# Altium PCB MIC29302.PcbDoc
Units mm, origin at the board's own origin, x right, y up, seen from the top; angles counter-clockwise.
Board outline 56.39 x 28.7 mm, 2 copper layers (Top Layer, Bottom Layer), stack 0.325 mm thick; 134 components, 7 nets, 626 pads, 56 vias.
Unrouted connection lines stored in the file: 1.
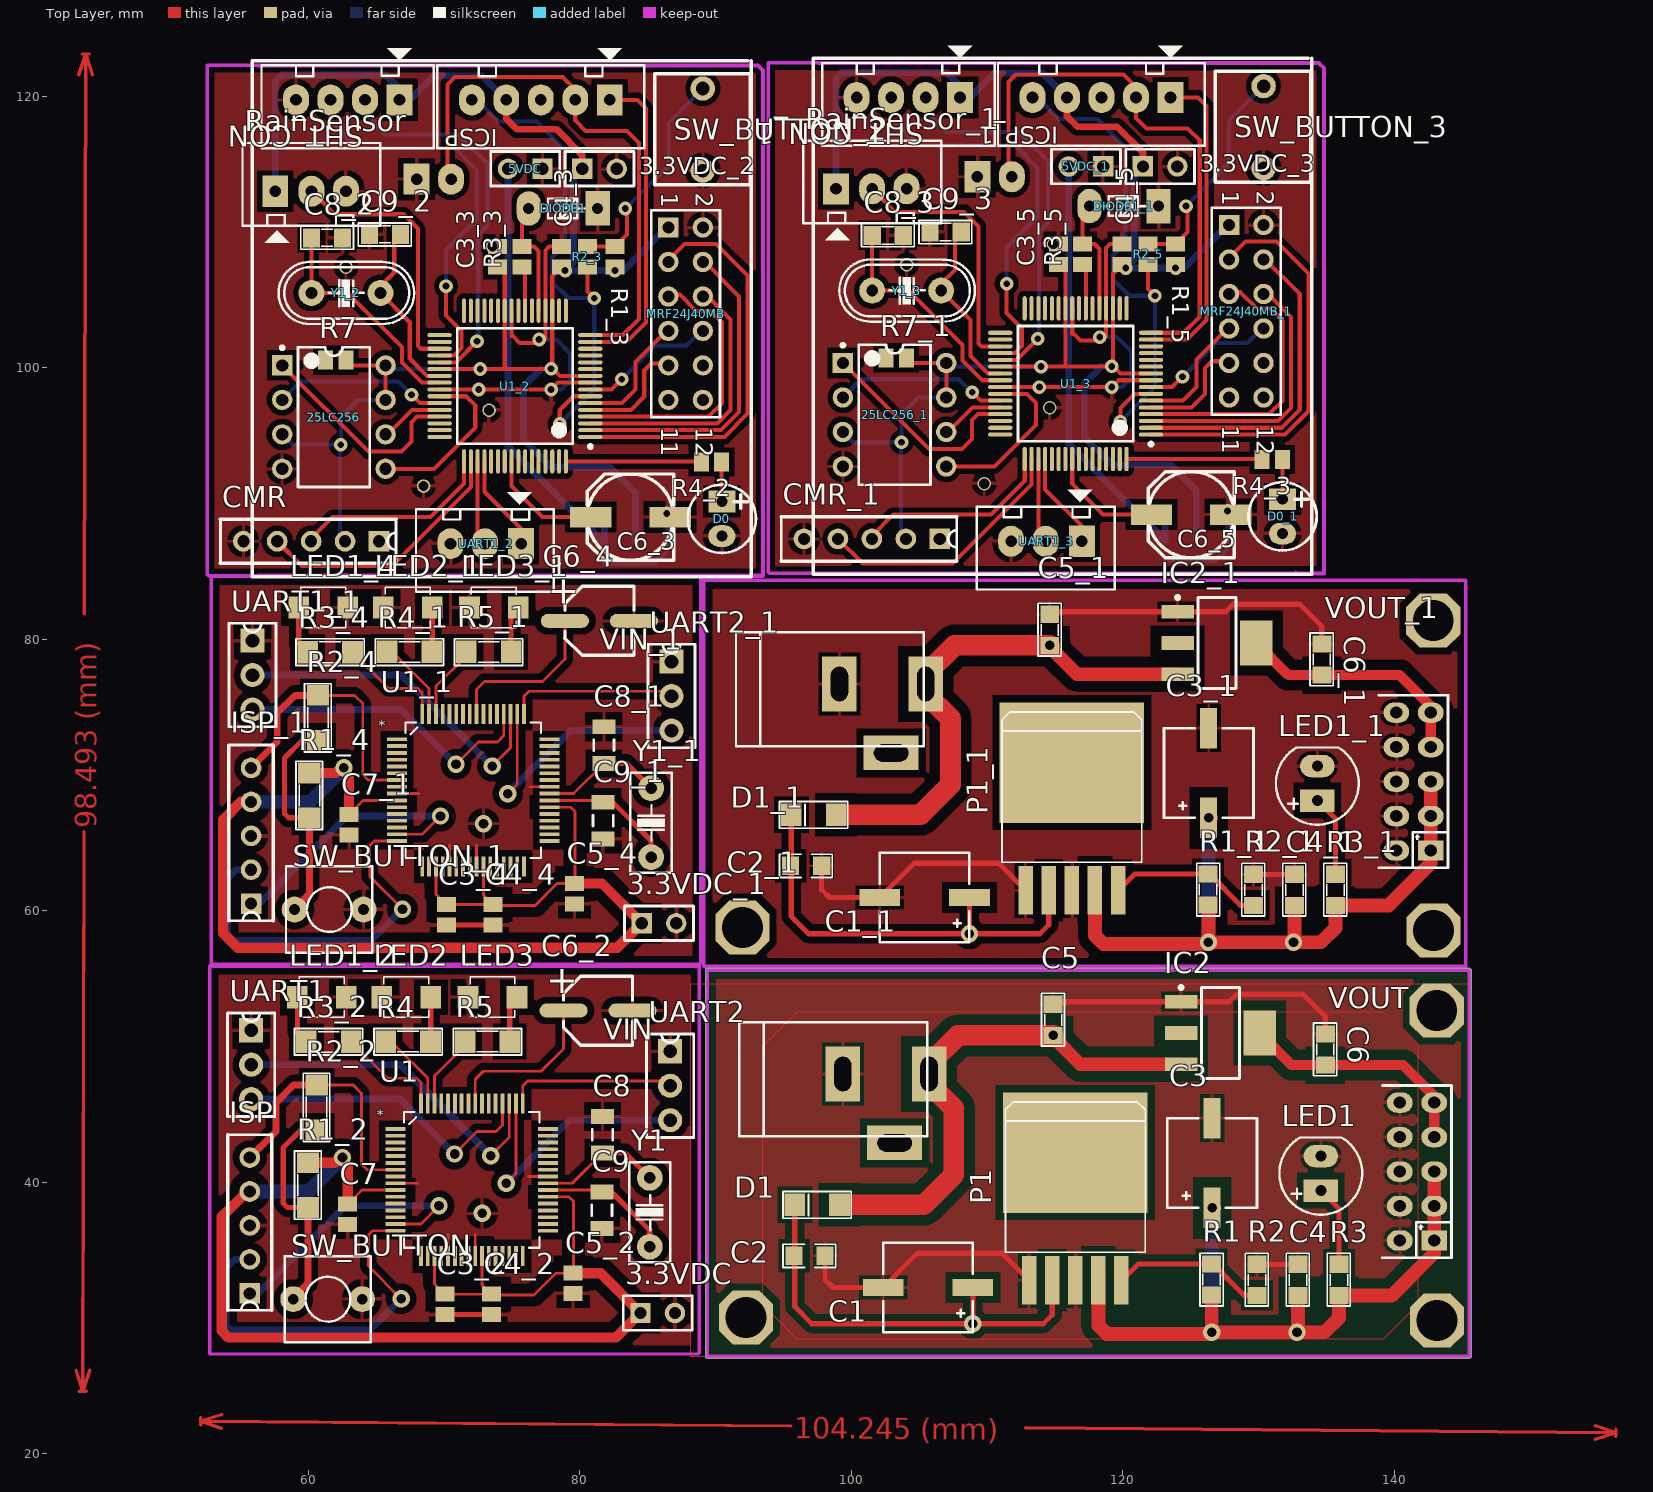
[diagram p0: Top Layer view]
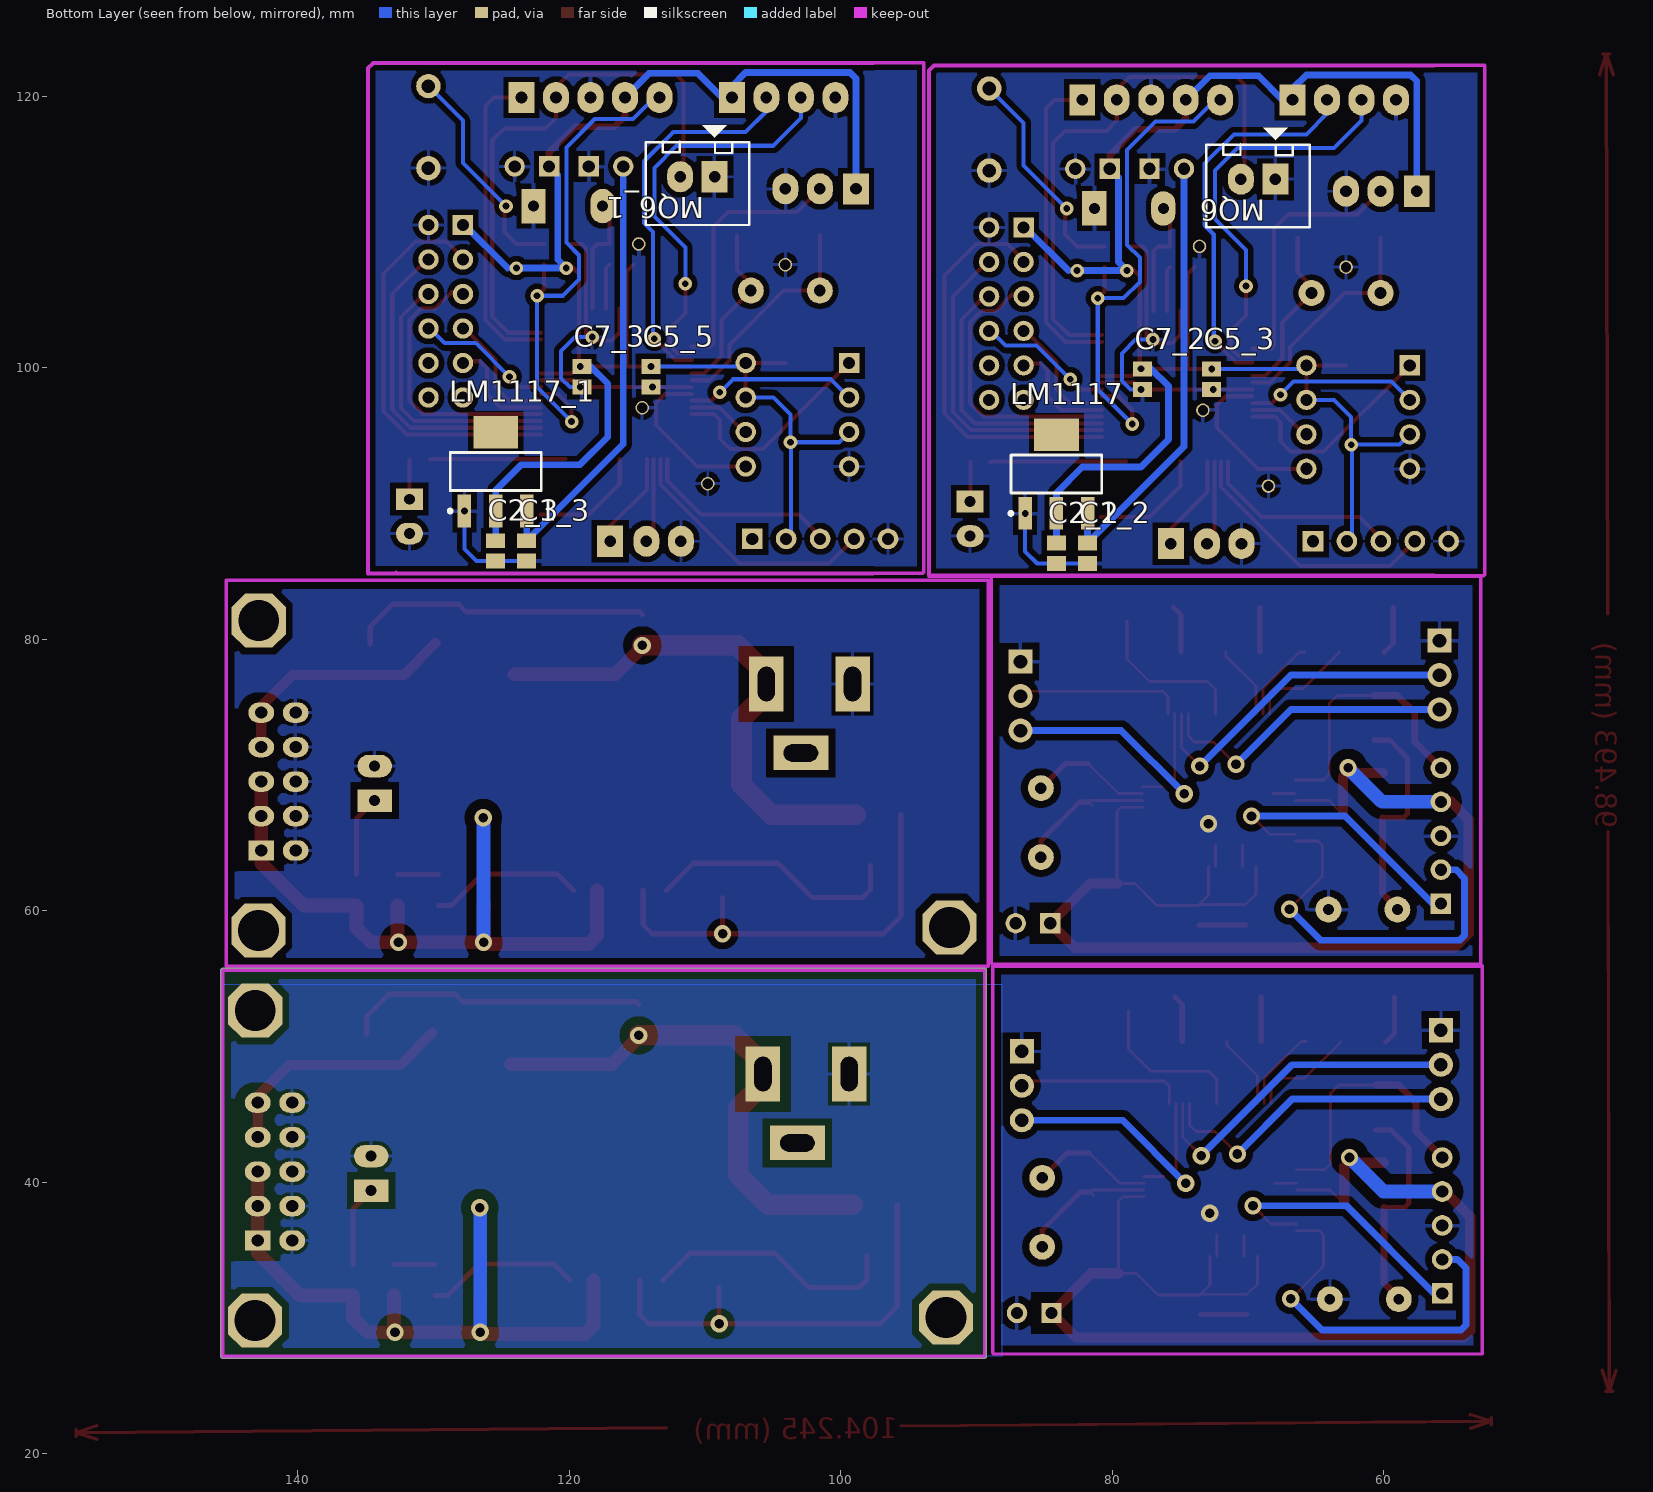
[diagram p1: Bottom Layer view, seen from below]

## Layer stack, top to bottom
Top Solder: solder mask 0.32, FR-4, Dk 4.8
Top Layer: signal copper 0.0356
Dielectric1: core 0.254, FR-4, Dk 4.2
Bottom Layer: signal copper 0.0356
Bottom Solder: solder mask 0.32, FR-4, Dk 4.8

## Board outline
89.281,27.178 ccw(c89.408,27.178) 89.408,27.051 145.542,27.051 ccw(c145.542,27.178) 145.669,27.178 145.669,55.626 ccw(c145.542,55.626) 145.542,55.753 89.408,55.753 ccw(c89.408,55.626) 89.281,55.626

## Design rules (kind name [scope] priority, off if disabled: settings)
Clearance 3.3V [InNet('3.3V')] p1: gap=0.762
Clearance VIN [InNet('IN')] p2: gap=0.762
Clearance VOUT [InNet('OUT')] p3: gap=0.762
Clearance [All] p4: gap=0.508
PolygonConnect [All] p1: connectstyle=Relief reliefconductorwidth=0.254 reliefentries=4 polygonreliefangle="90 Angle" airgapwidth=0.254
RoomDefinition Sheet2 [InComponentClass('Sheet2')] p1: confinementstyle=ConfineIn formatcopy=TRUE lockcomponents=FALSE outline 0,0 50.8,0 50.8,25.4 0,25.4
RoutingVias [All] p1: holewidth=0.711 width=1.27 viastyle="Through Hole" minholewidth=0.711 minwidth=1.27 maxholewidth=0.711 maxwidth=1.27
SolderMaskExpansion [All] p1: expansion=0.102
UnpouredPolygon [All] p1: allowunpoured=FALSE
Width 3.3 [InNet('3.3V')] p1: maxlimit=0.762 minlimit=0.762 preferedwidth=0.762
Width OUT [InNet('OUT')] p2: maxlimit=1.016 minlimit=1.016 preferedwidth=1.016
Width IN [InNet('IN')] p3: maxlimit=1.524 minlimit=1.524 preferedwidth=1.524
Width [All] p4: maxlimit=0.381 minlimit=0.381 preferedwidth=0.381
29 further rules are at their usual default settings.

## Classes and differential pairs
component class Sheet2: C1 C2 C3 C4 C5 C6 D1 IC2 LED1 P1 R1 R2 R3 VIN

## Components (designator, comment, footprint, x,y, rotation, side; value= is the part's Value field where it differs from the comment)
3.3VDC "Header 2" HDR1X2 84.48,30.378 r0 top
3.3VDC_1 "Header 2" HDR1X2 84.582,59.08 r0 top (schematic designator 3.3VDC)
3.3VDC_2 "Header 2" HDR1X2 80.188,114.656 r0 top (schematic designator 3.3VDC)
3.3VDC_3 "Header 2" HDR1X2 121.488,114.833 r0 top (schematic designator 3.3VDC)
5VDC "Header 2" HDR1X2 77.267,114.656 r180 top
5VDC_1 "Header 2" HDR1X2 118.567,114.833 r180 top (schematic designator 5VDC)
25LC256 "25LC256" DIP-8 61.9,96.368 r0 top
25LC256_1 "25LC256" DIP-8 103.2,96.545 r0 top (schematic designator 25LC256)
C1 "100uF/450V" CAP-D8-220uF/16V 105.664,32.258 r180 top
C1_1 "100uF/450V" CAP-D8-220uF/16V 105.41,60.985 r180 top (schematic designator C1)
C1_2 "Cap" C0805 81.839,86.335 r90 bottom (schematic designator C1)
C1_3 "Cap" C0805 123.139,86.512 r90 bottom (schematic designator C1)
C2 "1uF/450V" CAP0805 96.94,34.595 r0 top
C2_1 "1uF/450V" CAP0805 96.686,63.322 r0 top (schematic designator C2)
C2_2 "Cap" C0805 84.125,86.335 r90 bottom (schematic designator C2)
C2_3 "Cap" C0805 125.425,86.512 r90 bottom (schematic designator C2)
C3 "220uF/450V" CAP-D8-220uF/16V 126.594,41.427 r90 top
C3_1 "220uF/450V" CAP-D8-220uF/16V 126.34,70.155 r90 top (schematic designator C3)
C3_2 "Cap" C0805 70.079,31.013 r270 top (schematic designator C3)
C3_3 "Cap" C0805 73.965,108.179 r90 top (schematic designator C3)
C3_4 "Cap" C0805 70.18,59.715 r270 top (schematic designator C3)
C3_5 "Cap" C0805 115.265,108.356 r90 top (schematic designator C3)
C4 "103" SM-0805 132.91,32.817 r270 top
C4_1 "103" SM-0805 132.656,61.544 r270 top (schematic designator C4)
C4_2 "Cap" C0805 73.508,31.013 r90 top (schematic designator C4)
C4_3 "Cap" C0805 78.664,108.179 r270 top (schematic designator C4)
C4_4 "Cap" C0805 73.609,59.715 r90 top (schematic designator C4)
C4_5 "Cap" C0805 119.964,108.356 r270 top (schematic designator C4)
C5 "103" SM-0805 114.884,51.968 r270 top
C5_1 "103" SM-0805 114.63,80.696 r270 top (schematic designator C5)
C5_2 "Cap" C0805 79.527,32.563 r270 top (schematic designator C5)
C5_3 "Cap" C0805 72.695,99.162 r270 bottom (schematic designator C5)
C5_4 "Cap" C0805 79.629,61.265 r270 top (schematic designator C5)
C5_5 "Cap" C0805 113.995,99.339 r270 bottom (schematic designator C5)
C6 "103" SM-0805 134.925,49.784 r270 top
C6_1 "103" SM-0805 134.671,78.511 r270 top (schematic designator C6)
C6_2 "Cap2" "CAP 1uF SMD" 81.356,52.654 r0 top (schematic designator C6)
C6_3 "Cap2" "CAP P 6.3x5.4" 83.744,89.002 r180 top (schematic designator C6)
C6_4 "Cap2" "CAP 1uF SMD" 81.458,81.356 r0 top (schematic designator C6)
C6_5 "Cap2" "CAP P 6.3x5.4" 125.044,89.179 r180 top (schematic designator C6)
C7 "Cap" C0805 62.916,37.643 r270 top
C7_1 "Cap" C0805 63.017,66.345 r270 top (schematic designator C7)
C7_2 "Cap" C0805 77.775,99.162 r270 bottom (schematic designator C7)
C7_3 "Cap" C0805 119.075,99.339 r270 bottom (schematic designator C7)
C8 "Cap" C1206 81.686,43.51 r270 top
C8_1 "Cap" C1206 81.788,72.212 r270 top (schematic designator C8)
C8_2 "Cap" SM-0805 61.392,109.576 r180 top (schematic designator C8)
C8_3 "Cap" SM-0805 102.692,109.753 r180 top (schematic designator C8)
C9 "Cap" C1206 81.636,37.948 r90 top
C9_1 "Cap" C1206 81.737,66.65 r90 top (schematic designator C9)
C9_2 "Cap" SM-0805 65.659,109.83 r0 top (schematic designator C9)
C9_3 "Cap" SM-0805 106.959,110.007 r0 top (schematic designator C9)
CMR "ICSP" CON5#1 65.227,87.224 r270 top
CMR_1 "ICSP" CON5#1 106.528,87.401 r270 top (schematic designator CMR)
D0 "LED nguon" LED3mm 90.475,88.875 r270 top
D0_1 "LED nguon" LED3mm 131.775,89.052 r270 top (schematic designator D0)
D1 "1N5822" Diode1206 97.498,38.354 r180 top
D1_1 "1N5822" Diode1206 97.244,67.081 r180 top (schematic designator D1)
DIODE1 "Diode" DZ0.5A 76.251,111.735 r180 top
DIODE1_1 "Diode" DZ0.5A 117.551,111.912 r180 top (schematic designator DIODE1)
IC2 "LM1117" SOT223-4N 127.203,51.003 r0 top
IC2_1 "LM1117" SOT223-4N 126.949,79.731 r0 top (schematic designator IC2)
ICSP "ICSP" CON5#2 82.22,119.736 r180 top
ICSP_1 "ICSP" CON5#2 123.52,119.913 r180 top (schematic designator ICSP)
ISP "JP5" CON5#1 55.702,31.826 r180 top
ISP_1 "JP5" CON5#1 55.804,60.528 r180 top (schematic designator ISP)
LED1 "LED" LED-5-RED 134.595,39.395 r90 top
LED1_1 "LED" LED-5-RED 134.341,68.123 r90 top (schematic designator LED1)
LED1_2 "LED" SM-LED-GEEN 61.011,53.645 r0 top (schematic designator LED1)
LED1_4 "LED" SM-LED-GEEN 61.112,82.347 r0 top (schematic designator LED1)
LED2 "LED" SM-LED-GEEN 67.234,53.645 r180 top
LED2_1 "LED" SM-LED-GEEN 67.335,82.347 r180 top (schematic designator LED2)
LED3 "LED" SM-LED-GEEN 73.584,53.645 r180 top
LED3_1 "LED" SM-LED-GEEN 73.685,82.347 r180 top (schematic designator LED3)
LM1117 "LM317" SOT223-4N 84.125,92.177 r90 bottom
LM1117_1 "LM317" SOT223-4N 125.425,92.354 r90 bottom (schematic designator LM1117)
MQ6 "MQ-6" CON2 67.996,113.894 r0 bottom
MQ6_1 "MQ-6" CON2 109.296,114.071 r0 bottom (schematic designator MQ6)
MRF24J40MB "Header 6X2" MRF24J40MB_board_mini 90.348,111.608 r180 top
MRF24J40MB_1 "Header 6X2" MRF24J40MB_board_mini 131.648,111.785 r180 top (schematic designator MRF24J40MB)
P1 "MIC29302" LM2576_TO-263 116.51,40.386 r0 top
P1_1 "MIC29302" LM2576_TO-263 116.256,69.113 r0 top (schematic designator P1)
R1 "100k" RES0805 126.543,31.699 r90 top
R1_1 "100k" RES0805 126.289,60.427 r90 top (schematic designator R1)
R1_2 "Res1" SM-1206 59.995,39.802 r90 top (schematic designator R1)
R1_3 "Res1" C0805 82.601,108.179 r270 top (schematic designator R1)
R1_4 "Res1" SM-1206 60.096,68.504 r90 top (schematic designator R1)
R1_5 "Res1" C0805 123.901,108.356 r270 top (schematic designator R1)
R2 "43k" RES0805 129.891,33.96 r270 top
R2_1 "43k" RES0805 129.637,62.687 r270 top (schematic designator R2)
R2_2 "res" SM-1206 60.63,45.517 r90 top (schematic designator R2)
R2_3 "res" C0805 80.569,108.179 r270 top (schematic designator R2)
R2_4 "res" SM-1206 60.731,74.219 r90 top (schematic designator R2)
R2_5 "res" C0805 121.869,108.356 r270 top (schematic designator R2)
R3 "470" RES0805 135.928,33.96 r270 top
R3_1 "470" RES0805 135.674,62.687 r270 top (schematic designator R3)
R3_2 "220" SM-1206 61.519,50.343 r0 top (schematic designator R3)
R3_3 "Res1" C0805 75.743,108.179 r270 top (schematic designator R3)
R3_4 "220" SM-1206 61.62,79.045 r0 top (schematic designator R3)
R3_5 "Res1" C0805 117.043,108.356 r270 top (schematic designator R3)
R4 "220" SM-1206 67.361,50.368 r180 top
R4_1 "220" SM-1206 67.462,79.07 r180 top (schematic designator R4)
R4_2 "Res1" C0805 89.713,93.066 r180 top (schematic designator R4)
R4_3 "Res1" C0805 131.013,93.243 r180 top (schematic designator R4)
R5 "220" SM-1206 73.203,50.368 r180 top
R5_1 "220" SM-1206 73.304,79.07 r180 top (schematic designator R5)
R7 "Res Semi" C0805 62.027,100.559 r0 top
R7_1 "Res Semi" C0805 103.327,100.736 r0 top (schematic designator R7)
RainSensor "PIR module" CON3#1 57.709,113.005 r0 top
RainSensor_1 "PIR module" CON3#1 99.009,113.182 r0 top (schematic designator RainSensor)
SHT_CON "SHT10 conector" CON4 66.726,119.736 r180 top
SHT_CON_1 "SHT10 conector" CON4 108.026,119.913 r180 top (schematic designator SHT_CON)
SW_BUTTON "SW" SW2 63.983,31.394 r180 top
SW_BUTTON_1 "SW" SW2 64.084,60.096 r180 top (schematic designator SW_BUTTON)
SW_BUTTON_2 "SW" SW-2P-S 86.538,114.529 r90 top (schematic designator SW_BUTTON)
SW_BUTTON_3 "SW" SW-2P-S 127.838,114.706 r90 top (schematic designator SW_BUTTON)
U1 "PIC24FJ128GA306" TQFP64_10X10MC 72.06,40.183 r0 top
U1_1 "PIC24FJ128GA306" TQFP64_10X10MC 72.161,68.885 r0 top (schematic designator U1)
U1_2 "PIC24FJ128GA306" TQFP-PT64_N 75.235,98.654 r180 top (schematic designator U1)
U1_3 "PIC24FJ128GA306" TQFP-PT64_N 116.535,98.831 r180 top (schematic designator U1)
UART1 "JP3" CON3#2 55.804,51.206 r0 top
UART1_1 "JP3" CON3#2 55.905,79.908 r0 top (schematic designator UART1)
UART1_2 "UART1" CON3#1 75.565,87.046 r180 top (schematic designator UART1)
UART1_3 "UART1" CON3#1 116.865,87.224 r180 top (schematic designator UART1)
UART2 "JP3" CON3#2 86.665,49.657 r0 top
UART2_1 "JP3" CON3#2 86.766,78.359 r0 top (schematic designator UART2)
VIN "JP2" DC-IN 102.565,45.441 r0 top
VIN_1 "JP2" DC-IN 102.311,74.168 r0 top (schematic designator VIN)
VOUT "Header 5x2" HED2X5_cen 142.951,35.712 r90 top
VOUT_1 "Header 5x2" HED2X5_cen 142.697,64.44 r90 top (schematic designator VOUT)
Y1 "XTAL" XT455k 85.166,37.795 r90 top
Y1_1 "XTAL" XT455k 85.268,66.497 r90 top (schematic designator Y1)
Y1_2 "XTAL" XT2 62.789,105.512 r180 top (schematic designator Y1)
Y1_3 "XTAL" XT2 104.089,105.689 r180 top (schematic designator Y1)

## Footprints (in the part's own frame and the unit in brackets; to place one, negate y for a bottom-side part, rotate by r counter-clockwise, add the part's x,y. Pads: shape width x height; smd on the part's side, far side on the other; paste and mask are expansions set on the pad)
C0805 [mm] "Chip Capacitor, Body 2.0x1.3mm, IPC High Density"
  rect 1.1x1.4 smd: 1(-0.75,0) 2(0.75,0)
  body extent -1.1,-0.72 1.1,0.72, height 1.4
C1206 [mm] "Chip Capacitor, Body 3.2x1.6mm, IPC High Density"
  rect 1.1x1.7 smd: 1(-1.35,0) 2(1.35,0)
  silkscreen extent -0.4,-0.75 0.4,0.75, body extent -1.7,-0.9 1.7,0.9, height 1.3
CAP0805 [mil]
  rect 50x55 smd: 1(-45,0) 2(45,0)
  silkscreen extent -77,-34 76,33, body extent -39,-25 39,25, height 31
"CAP 1uF SMD" [mil] "TU SMD"
  oval 140x40 smd: 1(-100,0) 2(100,0)
  silkscreen extent -100,-100 100,100
"CAP P 6.3x5.4" [mil]
  rect 120x60 smd: 1(115,0) 2(-115,0)
  silkscreen extent -125,-125 125,125, body extent -138,-130 138,130, height 213
CAP-D8-220uF/16V [mm] "6.3 x 7.7 mm"
  rect 3x1.25 smd: 1(-3.302,0) 2(3.302,0)
  silkscreen extent -3.3,-3.3 3.3,3.3, body extent -3.5,-3.25 3.5,3.35, height 7.72
CON2 [mil] "CON2"
  rect 75x90 hole 34: 1(0,0)
  oval 75x90 hole 34: 2(100,0)
  silkscreen extent -100,-150 200,140, body extent -68,-70 168,107, height 236
CON3#1 [mil] "CON 3"
  rect 75x90 hole 34: 1(-5,0)
  oval 75x90 hole 34: 2(100,0) 3(200,0)
  silkscreen extent -100,-150 300,140, body extent -95,-90 295,136, height 276
CON3#2 [mil]
  rect 70x70 hole 39.37 unplated: 1(0,0)
  round 70 hole 39.37 unplated: 2(0,-100) 3(0,-200)
  silkscreen extent -68,-250 68,50
CON4 [mil] "CON4"
  rect 75x90 hole 34: 1(0,0)
  oval 75x90 hole 34: 2(100,0) 3(200,0) 4(300,0)
  silkscreen extent -100,-150 400,140, body extent -90,-90 398,136, height 276
CON5#1 [mil]
  rect 60x60 hole 35: 1(0,0)
  round 60 hole 35: 2(0,-98.43) 3(0,-196.85) 4(0,-295.28) 5(0,-393.7)
  silkscreen extent -64,-460 64,49
CON5#2 [mil] "CON5"
  rect 75x90 hole 34: 1(0,0)
  oval 75x90 hole 34: 2(100,0) 3(200,0) 4(300,0) 5(400,0)
  silkscreen extent -100,-150 500,140
DC-IN [mil] "Jac DC input"
  rect 100x160 hole 50 slot 100 at 90 deg: 1(125,100) 2(-125,100)
  rect 160x100 hole 50 slot 100 at 0 deg: 3(25,-100)
  silkscreen extent -425,-80 120,250, body extent -410,-105 134,269, height 434
Diode1206 [mil]
  rect 60x65 smd: 1(-65,0) 2(65,0)
  silkscreen extent -99,-38 99,39, body extent -72,-35 82,35, height 46
DIP-8 [mm] "DIP; 8 Leads; Row Spacing 7.62 mm; Pitch 2.54 mm"
  rect 1.5x1.5 hole 0.9: 1(-3.81,3.81)
  round 1.5 hole 0.9: 2(-3.81,1.27) 3(-3.81,-1.27) 4(-3.81,-3.81) 5(3.81,-3.81) 6(3.81,-1.27) 7(3.81,1.27) 8(3.81,3.81)
  silkscreen extent -3.93,-5.15 2.65,5.23, body extent -3.6,-5.15 3.6,5.15, height 5.08
DZ0.5A [mil] "Diode Zenner, W 80mil, L 300mil"
  oval 70x100 hole 32: 1(0,0)
  rect 70x100 hole 32: 2(-200,0)
  silkscreen extent -161,-29 -42,28
HDR1X2 [mm] "Connector; Header; 2 Position"
  rect 1.5x1.5 hole 0.9: 1(0,0)
  round 1.5 hole 0.9: 2(2.54,0)
  silkscreen extent -1.27,-1.27 3.81,1.27
HED2X5_cen [mm] "Connector; Header; 5x2 Position"
  rect 1.5x1.9 hole 0.9: 1(0,0)
  oval 1.5x1.9 hole 0.9: 2(2.54,0) 3(5.08,0) 4(7.62,0) 5(10.16,0) 6(0,2.54) 7(2.54,2.54) 8(5.08,2.54) 9(7.62,2.54) 10(10.16,2.54)
  silkscreen extent -1.27,-1.27 11.43,3.81, body extent -1.24,-10.02 11.46,2.86, height 5.02
LED3mm [mm]
  rect 1.6x2 hole 0.8: 1(-1.27,0)
  oval 1.6x2 hole 0.8: 2(1.27,0)
  silkscreen extent -2.52,-2.51 2.51,2.52, body extent -1.99,-1.5 1.99,1.99, height 5.38
LED-5-RED [mil] "LED 2 PIN, 5 ly , Only colour,pin to pin 100mil"
  rect 65x100 hole 32: 1(0,0)
  oval 65x100 hole 32: 2(100,0)
  silkscreen extent -70,-120 154,120, body extent -65,-119 149,118, height 339
LM2576_TO-263 [mil]
  rect 420x350 smd: 0(0,70.87)
  rect 42x140 smd: 1(-134,-299.13) 2(-67,-299.21) 3(0,-299.13) 4(67,-299.13) 5(134,-299.13)
  silkscreen extent -203,-218 203,218, body extent -200,-339 200,213, height 180
MRF24J40MB_board_mini [mm]
  rect 1.5x1.5 hole 0.9: 1(3.81,1.27)
  round 1.5 hole 0.9: 2(1.27,1.27) 3(3.81,3.81) 4(1.27,3.81) 5(3.81,6.35) 6(1.27,6.35) 7(3.81,8.89) 8(1.27,8.89) 9(3.81,11.43) 10(1.27,11.43) 11(3.81,13.97) 12(1.27,13.97)
  silkscreen extent -2.29,-11 34.45,27, body extent 0,0 5.08,15.24, height 7
RES0805 [mil]
  rect 50x55 smd: 1(0,0) 2(90,0)
  silkscreen extent -32,-34 121,33, body extent 6,-25 84,25, height 31
SM-0805 [mil] "Compoment SMD 80x50mil"
  rect 50x55 smd: 1(-45,0) 2(45,0)
  silkscreen extent -77,-34 76,33, body extent -40,-27 40,23, height 24
SM-1206 [mil] "Compoment SMD 120x60mil"
  rect 60x65 smd: 1(-65,0) 2(65,0)
  silkscreen extent -99,-38 99,39, body extent -83,-35 83,36, height 25
SM-LED-GEEN [mil] "Compoment SMD 120x60mil"
  rect 60x65 smd: 1(-71,0) 2(71,0)
  silkscreen extent -65,-59 65,59, body extent -63,-32 63,31, height 44
SOT223-4N [mm] "SOT223, 4-Leads, Body 6.5x3.5mm, Pitch 2.3mm, Lead Span 7mm, IPC Medium Density"
  rect 2.4x1 smd: 1(-2.9,2.3) 2(-2.9,0) 3(-2.9,-2.3)
  rect 2.4x3.3 smd: 4(2.9,0)
  silkscreen extent -3.02,-3.35 1.4,3.47, body extent -3.39,-3.27 3.5,3.23, height 1.72
SW2 [mil] "SW button 2pin, 250x 250 mil"
  round 75 hole 31: 1(0,0) 2(200,0)
  silkscreen extent -25,-125 225,125
SW-2P-S [mm]
  round 1.8 hole 1: 1(0,-2.54) 2(6.045,-2.54)
  silkscreen extent -1.04,-6.02 7.14,1.02
TQFP64_10X10MC [mil]
  rect 58x11 smd: 1(-221.22,147.64) 2(-221.22,127.95) 3(-221.22,108.27) 4(-221.22,88.58) 5(-221.22,68.9) 6(-221.22,49.21) 7(-221.22,29.53) 8(-221.22,9.84) 9(-221.22,-9.84) 10(-221.22,-29.53) 11(-221.22,-49.21) 12(-221.22,-68.9) 13(-221.22,-88.58) 14(-221.22,-108.27) 15(-221.22,-127.95) 16(-221.22,-147.64) 33(221.22,-147.64) 34(221.22,-127.95) 35(221.22,-108.27) 36(221.22,-88.58) 37(221.22,-68.9) 38(221.22,-49.21) 39(221.22,-29.53) 40(221.22,-9.84) 41(221.22,9.84) 42(221.22,29.53) 43(221.22,49.21) 44(221.22,68.9) 45(221.22,88.58) 46(221.22,108.27) 47(221.22,127.95) 48(221.22,147.64)
  rect 11x58 smd: 17(-147.64,-221.22) 18(-127.95,-221.22) 19(-108.27,-221.22) 20(-88.58,-221.22) 21(-68.9,-221.22) 22(-49.21,-221.22) 23(-29.53,-221.22) 24(-9.84,-221.22) 25(9.84,-221.22) 26(29.53,-221.22) 27(49.21,-221.22) 28(68.9,-221.22) 29(88.58,-221.22) 30(108.27,-221.22) 31(127.95,-221.22) 32(147.64,-221.22) 49(147.64,221.22) 50(127.95,221.22) 51(108.27,221.22) 52(88.58,221.22) 53(68.9,221.22) 54(49.21,221.22) 55(29.53,221.22) 56(9.84,221.22) 57(-9.84,221.22) 58(-29.53,221.22) 59(-49.21,221.22) 60(-68.9,221.22) 61(-88.58,221.22) 62(-108.27,221.22) 63(-127.95,221.22) 64(-147.64,221.22)
  silkscreen extent -197,-197 197,197
TQFP-PT64_N [mm] "Thin QFP, 64-Leads, Body 10x10mm, Pitch 0.5mm, IPC Medium Density"
  oval 1.8x0.3 smd: 1(-5.55,3.75) 2(-5.55,3.25) 3(-5.55,2.75) 4(-5.55,2.25) 5(-5.55,1.75) 6(-5.55,1.25) 7(-5.55,0.75) 8(-5.55,0.25) 9(-5.55,-0.25) 10(-5.55,-0.75) 11(-5.55,-1.25) 12(-5.55,-1.75) 13(-5.55,-2.25) 14(-5.55,-2.75) 15(-5.55,-3.25) 16(-5.55,-3.75) 33(5.55,-3.75) 34(5.55,-3.25) 35(5.55,-2.75) 36(5.55,-2.25) 37(5.55,-1.75) 38(5.55,-1.25) 39(5.55,-0.75) 40(5.55,-0.25) 41(5.55,0.25) 42(5.55,0.75) 43(5.55,1.25) 44(5.55,1.75) 45(5.55,2.25) 46(5.55,2.75) 47(5.55,3.25) 48(5.55,3.75)
  oval 0.3x1.8 smd: 17(-3.75,-5.55) 18(-3.25,-5.55) 19(-2.75,-5.55) 20(-2.25,-5.55) 21(-1.75,-5.55) 22(-1.25,-5.55) 23(-0.75,-5.55) 24(-0.25,-5.55) 25(0.25,-5.55) 26(0.75,-5.55) 27(1.25,-5.55) 28(1.75,-5.55) 29(2.25,-5.55) 30(2.75,-5.55) 31(3.25,-5.55) 32(3.75,-5.55) 49(3.75,5.55) 50(3.25,5.55) 51(2.75,5.55) 52(2.25,5.55) 53(1.75,5.55) 54(1.25,5.55) 55(0.75,5.55) 56(0.25,5.55) 57(-0.25,5.55) 58(-0.75,5.55) 59(-1.25,5.55) 60(-1.75,5.55) 61(-2.25,5.55) 62(-2.75,5.55) 63(-3.25,5.55) 64(-3.75,5.55)
  silkscreen extent -5.68,-4.25 4.25,4.57, body extent -5,-5 5,5, height 1.2
XT2 [mil] "Footpin for Crystal 2 pin"
  round 75 hole 34: 1(-100,0) 2(100,0)
  silkscreen extent -198,-90 195,90, body extent -233,-93 213,90, height 138
XT455k [mil] "Thach anh 455khz (Infrared)"
  round 75 hole 34: 1(-100,0) 2(100,0)
  silkscreen extent -145,-60 145,60

## Part data
3.3VDC 3.3VDC_1 3.3VDC_2 3.3VDC_3 5VDC 5VDC_1: "Header, 2-Pin"
C1 C1_1 C2 C2_1 C3 C3_1: library part CP9, "Cap 10000uF/63V"
C1_2 C1_3 C2_2 C2_3 C3_2 C3_3 C3_4 C3_5 C4_2 C4_3 C4_4 C4_5 C5_2 C5_3 C5_4 C5_5 C6_2 C6_3 C6_4 C6_5 C7 C7_1 C7_2 C7_3 C8 C8_1 C8_2 C8_3 C9 C9_1 C9_2 C9_3: "Capacitor"
C4 C4_1 C5 C5_1 C6 C6_1: library part CM, "Cap SMD"
CMR CMR_1 ICSP ICSP_1: library part "Header 5", "Header, 5-Pin"
D0 D0_1: library part LED0, "Typical INFRARED GaAs LED"
D1 D1_1: library part D5A, "Diode 5A"
DIODE1 DIODE1_1: "Default Diode"
IC2 IC2_1: "3v3"
ISP ISP_1: library part Con5, "Connector 5"
LED1 LED1_1 LED1_2 LED1_4 LED2 LED2_1 LED3 LED3_1: "LED Single colour Green and Red"
LM1117 LM1117_1: "Adj Voltage +1.2 -> +37V"
MQ6 MQ6_1: library part "Header 2", "Header, 2-Pin"
MRF24J40MB MRF24J40MB_1: "Header, 6-Pin, Dual row"
P1 P1_1: library part LM2576
R1 R1_1 R2 R2_1 R3 R3_1 R3_2 R3_4 R4 R4_1 R5 R5_1: library part R, "Resistor 1/4W"
R1_2 R1_3 R1_4 R1_5 R3_3 R3_5 R4_2 R4_3: "Resistor"
R2_2 R2_3 R2_4 R2_5: library part Res1, "Resistor"
R7 R7_1: "Semiconductor Resistor"
RainSensor RainSensor_1: library part "Header 3H", "Header, 3-Pin, Right Angle"
SHT_CON SHT_CON_1: library part "Header 4", "Header, 4-Pin"
SW_BUTTON SW_BUTTON_1 SW_BUTTON_2 SW_BUTTON_3: library part SW2, "Switch button 2 pin"
UART1 UART1_1 UART1_2 UART1_3 UART2 UART2_1: library part Con3, "Connector 3"
VIN VIN_1: library part Con2, "Connector 2"
VOUT VOUT_1: library part HED5x2
Y1 Y1_1 Y1_2 Y1_3: "Crystal Oscillator"

## Free pads (board coordinates)
  round 1 hole 0.762: 0(62.789,107.417) 0(68.504,91.288) 0(73.33,96.876) 0(73.584,108.941) 0(104.089,107.594) 0(109.804,91.465) 0(114.63,97.053) 0(114.884,109.118)
  oct 4x4 hole 3: 3(91.999,58.776) 3(92.253,30.048) 3(142.875,81.382) 3(142.9,58.547) 3(143.129,52.654) 3(143.154,29.82)

## Via types
v1: diameter 1, hole 0.5, Top Layer to Bottom Layer, 32 vias
v2: diameter 1.27, hole 0.711, Top Layer to Bottom Layer, 24 vias

## Nets (pads, with @x,y where several pads share a name; then routed paths per layer and width w, separated by ;. In a path a pad name is that pad's centre, name@x,y a point inside that pad or via, vN(x,y) a via of type N, cw(c..) or ccw(c..) an arc to the next point about the centre after c; other vN are vias at no path point)
3.3V: C6.2 IC2.2 IC2.4 VOUT.4 VOUT.5 | length 17.8
  Top Layer w0.762: IC2.4 132.465,48.641 C6.2 140.665,48.641 142.951,46.355 VOUT.5 VOUT.4
GND: C1.2 C2.2 C3.2 C4.1 C5.1 C6.1 IC2.1 LED1.2 P1.1 P1.3 R2.1 VIN.2 VOUT.6 VOUT.7 VOUT.8 VOUT.9 VOUT.10 | length 44.2
  Top Layer w0.381: C2.2 98.083,32.829 98.654,32.258 C1.2 104.877,34.773 111.122,34.773 P1.1 ; C5.1 115.076,53.303 IC2.1 127.847,53.303 128.403,53.86 133.287,53.86 134.925,52.222 C6.1 ; R2.1 C4.1
IN: C5.2 D1.1 IC2.3 VIN.1 | length 38.5
  Top Layer w1.016: C5.2@114.884,50.698 116.879,48.703 IC2.3
  Top Layer w1.524: D1.1 105.359,38.354 107.569,40.564 107.569,45.441 105.74,47.269 VIN.1 105.74,48.692 107.874,50.825 v2(114.884,50.825)
NetC1_1: C1.1 C2.1 D1.2 P1.2 | length 32.5
  Top Layer w0.381: D1.2 95.847,30.848 97.104,29.591 v2(108.966,29.591) ; C1.1 v2(108.966,29.591) ; P1.2 114.808,30.251 114.148,29.591 v2(108.966,29.591)
NetLED1_1: LED1.1 R3.1 | length 6
  Top Layer w0.381: LED1.1 135.928,38.062 R3.1
NetP1_5: P1.5 R1.2 R2.2 | length 11.4
  Top Layer w0.381: P1.5@119.951,32.788 121.149,33.985 R1.2 126.644,33.985 128.956,31.674 R2.2
OUT: C3.1 C4.2 P1.4 R1.1 R3.2 VOUT.1 VOUT.2 VOUT.3 | length 52.4
  Top Layer w1.016: P1.4 118.212,29.464 118.847,28.829 126.441,28.829 v2(126.568,28.956) ; R1.1 126.568,31.674 v2(126.568,28.956) ; C4.2 132.91,29.024 v2(132.842,28.956) ; VOUT.3 VOUT.2 VOUT.1 142.951,34.798 139.827,31.674 R3.2 135.928,30.01 134.874,28.956 v2(132.842,28.956) ; v2(126.568,28.956) v2(132.842,28.956)
  Bottom Layer w1.016: v2(126.568,28.956) 126.568,38.1 v2(126.594,38.125)
pads on no net: 3.3VDC.1 3.3VDC.2 3.3VDC_1.1 3.3VDC_1.2 3.3VDC_2.1 3.3VDC_2.2 3.3VDC_3.1 3.3VDC_3.2 5VDC.1 5VDC.2 5VDC_1.1 5VDC_1.2 25LC256.1 25LC256.2 25LC256.3 25LC256.4 25LC256.5 25LC256.6 25LC256.7 25LC256.8 25LC256_1.1 25LC256_1.2 25LC256_1.3 25LC256_1.4 25LC256_1.5 25LC256_1.6 25LC256_1.7 25LC256_1.8 C1_1.1 C1_1.2 C1_2.1 C1_2.2 C1_3.1 C1_3.2 C2_1.1 C2_1.2 C2_2.1 C2_2.2 C2_3.1 C2_3.2 C3_1.1 C3_1.2 C3_2.1 C3_2.2 C3_3.1 C3_3.2 C3_4.1 C3_4.2 C3_5.1 C3_5.2 C4_1.1 C4_1.2 C4_2.1 C4_2.2 C4_3.1 C4_3.2 C4_4.1 C4_4.2 C4_5.1 C4_5.2 C5_1.1 C5_1.2 C5_2.1 C5_2.2 C5_3.1 C5_3.2 C5_4.1 C5_4.2 C5_5.1 C5_5.2 C6_1.1 C6_1.2 C6_2.1 C6_2.2 C6_3.1 C6_3.2 C6_4.1 C6_4.2 C6_5.1 C6_5.2 C7.1 C7.2 C7_1.1 C7_1.2 C7_2.1 C7_2.2 C7_3.1 C7_3.2 C8.1 C8.2 C8_1.1 C8_1.2 C8_2.1 C8_2.2 C8_3.1 C8_3.2 C9.1 C9.2 C9_1.1 C9_1.2 C9_2.1 C9_2.2 C9_3.1 C9_3.2 CMR.1 CMR.2 CMR.3 CMR.4 CMR.5 CMR_1.1 CMR_1.2 CMR_1.3 CMR_1.4 CMR_1.5 D0.1 D0.2 D0_1.1 D0_1.2 D1_1.1 D1_1.2 DIODE1.1 DIODE1.2 DIODE1_1.1 DIODE1_1.2 IC2_1.1 IC2_1.2 IC2_1.3 IC2_1.4 ICSP.1 ICSP.2 ICSP.3 ICSP.4 ICSP.5 ICSP_1.1 ICSP_1.2 ICSP_1.3 ICSP_1.4 ICSP_1.5 ISP.1 ISP.2 ISP.3 ISP.4 ISP.5 ISP_1.1 ISP_1.2 ISP_1.3 ISP_1.4 ISP_1.5 LED1_1.1 LED1_1.2 LED1_2.1 LED1_2.2 LED1_4.1 LED1_4.2 LED2.1 LED2.2 LED2_1.1 LED2_1.2 LED3.1 LED3.2 LED3_1.1 LED3_1.2 LM1117.1 LM1117.2 LM1117.3 LM1117.4 LM1117_1.1 LM1117_1.2 LM1117_1.3 LM1117_1.4 MQ6.1 MQ6.2 MQ6_1.1 MQ6_1.2 MRF24J40MB.1 MRF24J40MB.2 MRF24J40MB.3 MRF24J40MB.4 MRF24J40MB.5 MRF24J40MB.6 MRF24J40MB.7 MRF24J40MB.8 MRF24J40MB.9 MRF24J40MB.10 MRF24J40MB.11 MRF24J40MB.12 MRF24J40MB_1.1 MRF24J40MB_1.2 MRF24J40MB_1.3 MRF24J40MB_1.4 MRF24J40MB_1.5 MRF24J40MB_1.6 MRF24J40MB_1.7 MRF24J40MB_1.8 MRF24J40MB_1.9 MRF24J40MB_1.10 MRF24J40MB_1.11 MRF24J40MB_1.12 P1.0 P1_1.0 P1_1.1 P1_1.2 P1_1.3 P1_1.4 P1_1.5 R1_1.1 R1_1.2 R1_2.1 R1_2.2 R1_3.1 R1_3.2 R1_4.1 R1_4.2 R1_5.1 R1_5.2 R2_1.1 R2_1.2 R2_2.1 R2_2.2 R2_3.1 R2_3.2 R2_4.1 R2_4.2 R2_5.1 R2_5.2 R3_1.1 R3_1.2 R3_2.1 R3_2.2 R3_3.1 R3_3.2 R3_4.1 R3_4.2 R3_5.1 R3_5.2 R4.1 R4.2 R4_1.1 R4_1.2 R4_2.1 R4_2.2 R4_3.1 R4_3.2 R5.1 R5.2 R5_1.1 R5_1.2 R7.1 R7.2 R7_1.1 R7_1.2 RainSensor.1 RainSensor.2 RainSensor.3 RainSensor_1.1 RainSensor_1.2 RainSensor_1.3 SHT_CON.1 SHT_CON.2 SHT_CON.3 SHT_CON.4 SHT_CON_1.1 SHT_CON_1.2 SHT_CON_1.3 SHT_CON_1.4 SW_BUTTON.1 SW_BUTTON.2 SW_BUTTON_1.1 SW_BUTTON_1.2 SW_BUTTON_2.1 SW_BUTTON_2.2 SW_BUTTON_3.1 SW_BUTTON_3.2 U1.1 U1.2 U1.3 U1.4 U1.5 U1.6 U1.7 U1.8 U1.9 U1.10 U1.11 U1.12 U1.13 U1.14 U1.15 U1.16 U1.17 U1.18 U1.19 U1.20 U1.21 U1.22 U1.23 U1.24 U1.25 U1.26 U1.27 U1.28 U1.29 U1.30 U1.31 U1.32 U1.33 U1.34 U1.35 U1.36 U1.37 U1.38 U1.39 U1.40 U1.41 U1.42 U1.43 U1.44 U1.45 U1.46 U1.47 U1.48 U1.49 U1.50 U1.51 U1.52 U1.53 U1.54 U1.55 U1.56 U1.57 U1.58 U1.59 U1.60 U1.61 U1.62 U1.63 U1.64 U1_1.1 U1_1.2 U1_1.3 U1_1.4 U1_1.5 U1_1.6 U1_1.7 U1_1.8 U1_1.9 U1_1.10 U1_1.11 U1_1.12 U1_1.13 U1_1.14 U1_1.15 U1_1.16 U1_1.17 U1_1.18 U1_1.19 U1_1.20 U1_1.21 U1_1.22 U1_1.23 U1_1.24 U1_1.25 U1_1.26 U1_1.27 U1_1.28 U1_1.29 U1_1.30 U1_1.31 U1_1.32 U1_1.33 U1_1.34 U1_1.35 U1_1.36 U1_1.37 U1_1.38 U1_1.39 U1_1.40 U1_1.41 U1_1.42 U1_1.43 U1_1.44 U1_1.45 U1_1.46 U1_1.47 U1_1.48 U1_1.49 U1_1.50 U1_1.51 U1_1.52 U1_1.53 U1_1.54 U1_1.55 U1_1.56 U1_1.57 U1_1.58 U1_1.59 U1_1.60 U1_1.61 U1_1.62 U1_1.63 U1_1.64 U1_2.1 U1_2.2 U1_2.3 U1_2.4 U1_2.5 U1_2.6 U1_2.7 U1_2.8 U1_2.9 U1_2.10 U1_2.11 U1_2.12 U1_2.13 U1_2.14 U1_2.15 U1_2.16 U1_2.17 U1_2.18 U1_2.19 U1_2.20 U1_2.21 U1_2.22 U1_2.23 U1_2.24 U1_2.25 U1_2.26 U1_2.27 U1_2.28 U1_2.29 U1_2.30 U1_2.31 U1_2.32 U1_2.33 U1_2.34 U1_2.35 U1_2.36 U1_2.37 U1_2.38 U1_2.39 U1_2.40 U1_2.41 U1_2.42 U1_2.43 U1_2.44 U1_2.45 U1_2.46 U1_2.47 U1_2.48 U1_2.49 U1_2.50 U1_2.51 U1_2.52 U1_2.53 U1_2.54 U1_2.55 U1_2.56 U1_2.57 U1_2.58 U1_2.59 U1_2.60 U1_2.61 U1_2.62 U1_2.63 U1_2.64 U1_3.1 U1_3.2 U1_3.3 U1_3.4 U1_3.5 U1_3.6 U1_3.7 U1_3.8 U1_3.9 U1_3.10 U1_3.11 U1_3.12 U1_3.13 U1_3.14 U1_3.15 U1_3.16 U1_3.17 U1_3.18 U1_3.19 U1_3.20 U1_3.21 U1_3.22 U1_3.23 U1_3.24 U1_3.25 U1_3.26 U1_3.27 U1_3.28 U1_3.29 U1_3.30 U1_3.31 U1_3.32 U1_3.33 U1_3.34 U1_3.35 U1_3.36 U1_3.37 U1_3.38 U1_3.39 U1_3.40 U1_3.41 U1_3.42 U1_3.43 U1_3.44 U1_3.45 U1_3.46 U1_3.47 U1_3.48 U1_3.49 U1_3.50 U1_3.51 U1_3.52 U1_3.53 U1_3.54 U1_3.55 U1_3.56 U1_3.57 U1_3.58 U1_3.59 U1_3.60 U1_3.61 U1_3.62 U1_3.63 U1_3.64 UART1.1 UART1.2 UART1.3 UART1_1.1 UART1_1.2 UART1_1.3 UART1_2.1 UART1_2.2 UART1_2.3 UART1_3.1 UART1_3.2 UART1_3.3 UART2.1 UART2.2 UART2.3 UART2_1.1 UART2_1.2 UART2_1.3 VIN.3 VIN_1.1 VIN_1.2 VIN_1.3 VOUT_1.1 VOUT_1.2 VOUT_1.3 VOUT_1.4 VOUT_1.5 VOUT_1.6 VOUT_1.7 VOUT_1.8 VOUT_1.9 VOUT_1.10 Y1.1 Y1.2 Y1_1.1 Y1_1.2 Y1_2.1 Y1_2.2 Y1_3.1 Y1_3.2
copper on no net: | length 2402.7
  Top Layer w0.203: 59.995,41.314 59.995,41.453 ; 60.096,70.016 60.096,70.155 ; 60.63,47.168 63.322,47.168 63.932,46.558 63.932,41.326 64.325,40.933 66.441,40.933 ; 60.731,75.87 63.424,75.87 64.033,75.26 64.033,70.028 64.426,69.635 66.542,69.635 ; 62.916,38.393 63.956,39.433 66.441,39.433 ; 63.017,67.095 64.057,68.135 66.542,68.135 ; 63.17,50.343 65.837,47.676 67.996,47.676 68.31,47.362 68.31,45.802 ; 63.271,79.045 65.938,76.378 68.097,76.378 68.411,76.064 68.411,74.504 ; 65.71,50.368 66.117,50.368 68.81,47.676 68.81,45.802 ; 65.811,79.07 66.219,79.07 68.911,76.378 68.911,74.504 ; 66.441,36.433 64.754,36.433 64.44,36.119 64.44,33.833 v2(66.853,31.42) ; 66.441,36.933 68.302,36.933 v2(69.647,38.278) ; 66.441,39.933 68.068,39.933 ; 66.542,65.135 64.855,65.135 64.541,64.821 64.541,62.535 v2(66.954,60.122) ; 66.542,65.635 68.403,65.635 v2(69.748,66.98) ; 66.542,68.635 68.17,68.635 ; 69.31,32.532 69.31,34.564 ; 69.31,45.802 69.31,47.847 71.552,50.089 71.552,50.368 ; 69.361,32.481 70.079,31.763 73.508,31.763 ; 69.411,61.234 69.411,63.266 ; 69.411,74.504 69.411,76.549 71.653,78.791 71.653,79.07 ; 69.462,61.183 70.18,60.465 73.609,60.465 ; 70.31,34.564 70.31,36.121 ; 70.411,63.266 70.411,64.823 ; v2(70.79,42.088) 72.441,43.739 73.838,43.739 74.31,44.211 74.31,45.802 ; v2(70.891,70.79) 72.542,72.441 73.939,72.441 74.411,72.913 74.411,74.504 ; 72.31,34.564 72.31,36.14 ; 72.31,45.802 72.31,47.596 72.898,48.184 77.165,48.184 78.816,49.835 78.816,52.654 ; 72.411,63.266 72.411,64.842 ; 72.411,74.504 72.411,76.298 73,76.886 77.267,76.886 78.918,78.537 78.918,81.356 ; 72.81,32.461 72.81,34.564 ; 72.861,32.41 73.508,31.763 ; 72.911,61.163 72.911,63.266 ; 72.962,61.112 73.609,60.465 ; v2(73.457,41.961) 74.81,43.314 74.81,45.802 ; v2(73.558,70.663) 74.911,72.016 74.911,74.504 ; v2(74.6,39.929) 75.31,40.639 75.31,45.802 ; v2(74.701,68.631) 75.411,69.341 75.411,74.504 ; 75.81,45.802 75.81,47.108 76.175,47.473 86.309,47.473 86.665,47.117 ; 75.911,74.504 75.911,75.81 76.276,76.175 86.411,76.175 86.766,75.819 ; 76.221,40.433 77.679,40.433 ; 76.323,69.135 77.78,69.135 ; 77.679,38.933 79.228,38.933 79.553,38.608 79.553,33.338 79.527,33.313 78.245,33.313 76.632,31.699 73.572,31.699 73.508,31.763 ; 77.679,39.433 81.5,39.433 81.636,39.298 ; 77.679,39.933 79.459,39.933 81.686,42.16 ; 77.78,67.635 79.33,67.635 79.654,67.31 79.654,62.04 79.629,62.015 78.347,62.015 76.733,60.401 73.673,60.401 73.609,60.465 ; 77.78,68.135 81.602,68.135 81.737,68 ; 77.78,68.635 79.561,68.635 81.788,70.862 ; 81.423,39.044 81.423,39.091 ; 81.525,67.746 81.525,67.793
  Top Layer w0.254: 42.903,26.146 43.408,24.621 ; 43.101,121.591 43.612,123.114 ; 43.154,24.621 43.662,24.62 ; 43.358,123.114 43.866,123.113 ; 43.493,65.843 43.408,24.621 ; 43.527,81.891 43.612,123.114 ; 43.919,26.144 43.408,24.621 ; 44.117,121.589 43.612,123.114 ; 52.093,22.149 52.097,22.657 ; 53.615,21.883 52.095,22.403 ; 53.623,22.899 52.095,22.403 ; 95.558,22.053 52.095,22.403 ; 112.875,21.914 156.337,21.565 ; 154.809,21.069 156.337,21.565 ; 154.817,22.085 156.337,21.565 ; 156.335,21.311 156.339,21.819
  Top Layer w0.3: 57.727,87.224 59.556,85.395 66.167,85.395 71.985,91.213 71.985,93.104 ; 58.09,100.178 64.44,93.828 66.878,93.828 67.615,94.564 67.615,95.987 68.032,96.404 69.685,96.404 ; 60.227,87.43 61.799,89.002 69.012,89.002 71.485,91.475 71.485,93.104 ; 60.249,109.576 60.249,105.512 62.916,105.512 66.91,101.518 66.91,100.375 68.381,98.904 69.685,98.904 ; 60.249,113.894 60.249,113.005 61.942,111.312 67.022,111.312 68.088,110.246 68.088,101.61 68.294,101.404 69.685,101.404 ; 62.777,100.178 65.71,100.178 65.71,97.638 ; 65.71,92.558 69.266,92.558 72.314,95.606 72.314,97.231 71.641,97.904 69.685,97.904 ; 65.71,95.098 65.837,95.098 67.643,96.904 69.685,96.904 ; 66.345,109.576 66.345,107.036 65.329,106.02 65.329,105.512 67.488,103.353 67.488,100.686 68.77,99.404 69.685,99.404 ; v1(67.615,98.019) 68.23,97.404 69.685,97.404 ; 69.685,98.404 72.564,98.404 v1(72.568,98.4) v1(77.902,98.4) 78.406,98.904 80.785,98.904 ; 69.685,99.904 72.675,99.904 v1(72.683,99.912) 74.08,99.912 74.092,99.924 74.422,99.924 ; 69.685,100.404 70.889,100.404 v1(72.441,101.956) ; 69.685,100.904 70.754,100.904 71.298,101.448 71.298,102.718 70.155,103.861 v1(70.155,106.02) ; 70.536,113.894 70.282,114.148 70.282,120.879 70.825,121.422 78.756,121.422 79.68,120.498 79.68,119.736 79.68,118.212 80.442,117.45 83.49,117.45 84.379,116.561 84.379,103.607 83.176,102.404 80.785,102.404 ; 72.485,93.104 72.485,87.586 73.025,87.046 ; 72.985,93.104 72.985,90.871 75.692,88.163 75.692,87.046 ; 73.965,107.429 74.485,106.909 74.485,104.204 74.485,99.986 74.422,99.924 ; 74.985,93.104 74.985,91.284 77.267,89.002 80.823,89.002 ; 74.985,102.333 74.985,104.204 ; 75.085,102.333 75.589,101.829 77.14,101.829 77.485,102.174 77.485,104.204 77.485,108.651 77.763,108.929 78.664,108.929 ; 75.743,107.429 75.985,107.187 75.985,104.204 ; 76.251,111.735 75.743,111.227 75.743,108.929 76.644,108.929 76.985,108.588 76.985,104.204 ; v1(78.537,95.86) 78.537,96.876 79.565,97.904 80.785,97.904 ; v1(78.93,107.163) 78.664,107.429 77.985,106.75 77.985,104.204 77.985,100.007 v1(77.902,99.924) ; 78.985,93.104 88.925,93.104 88.963,93.066 ; 80.569,107.429 80.569,105.639 v1(81.077,105.131) ; 80.569,108.929 82.601,108.929 83.49,109.818 83.49,111.862 v1(83.363,111.735) ; 80.785,94.904 90.662,94.904 92.38,96.622 92.38,106.782 90.037,109.125 87.738,109.125 86.538,107.925 ; 80.785,95.404 90.4,95.404 91.745,96.749 91.745,105.258 89.078,107.925 ; 80.785,95.904 90.138,95.904 91.11,96.876 91.11,103.566 89.291,105.385 89.078,105.385 ; 80.785,96.404 89.495,96.404 90.475,97.384 90.475,103.353 89.643,104.185 88.581,104.185 87.381,105.385 86.538,105.385 ; 80.785,96.904 83.772,96.904 84.76,97.892 84.76,99.797 85.268,100.305 86.538,100.305 ; 80.785,97.404 83.129,97.404 84.125,98.4 84.125,100.432 86.538,102.845 ; 80.785,98.404 82.351,98.404 v1(83.109,99.162) ; 80.785,99.404 78.549,99.404 78.029,99.924 v1(77.902,99.924) ; 80.785,101.904 83.438,101.904 84.881,103.347 84.881,119.101 84.246,119.736 82.22,119.736 ; 90.463,93.066 90.463,90.157 90.475,90.145 ; 99.028,87.401 100.856,85.573 107.467,85.573 113.285,91.39 113.285,93.281 ; 99.39,100.355 105.74,94.005 108.179,94.005 108.915,94.742 108.915,96.164 109.332,96.581 110.985,96.581 ; 101.528,87.608 103.099,89.179 110.312,89.179 112.785,91.652 112.785,93.281 ; 101.549,109.753 101.549,105.689 104.216,105.689 108.21,101.695 108.21,100.552 109.681,99.081 110.985,99.081 ; 101.549,114.071 101.549,113.182 103.242,111.489 108.322,111.489 109.388,110.423 109.388,101.787 109.594,101.581 110.985,101.581 ; 104.077,100.355 107.01,100.355 107.01,97.815 ; 107.01,92.735 110.566,92.735 113.614,95.783 113.614,97.409 112.942,98.081 110.985,98.081 ; 107.01,95.275 107.137,95.275 108.943,97.081 110.985,97.081 ; 107.645,109.753 107.645,107.213 106.629,106.197 106.629,105.689 108.788,103.53 108.788,100.863 110.07,99.581 110.985,99.581 ; v1(108.915,98.196) 109.53,97.581 110.985,97.581 ; 110.985,98.581 113.864,98.581 v1(113.868,98.577) v1(119.202,98.577) 119.706,99.081 122.085,99.081 ; 110.985,100.081 113.975,100.081 v1(113.983,100.089) 115.38,100.089 115.392,100.101 115.722,100.101 ; 110.985,100.581 112.189,100.581 v1(113.741,102.133) ; 110.985,101.081 112.054,101.081 112.598,101.625 112.598,102.895 111.455,104.038 v1(111.455,106.197) ; 111.836,114.071 111.582,114.325 111.582,121.056 112.125,121.599 120.056,121.599 120.98,120.675 120.98,119.913 120.98,118.389 121.742,117.627 124.79,117.627 125.679,116.738 125.679,103.784 124.476,102.581 122.085,102.581 ; 113.785,93.281 113.785,87.764 114.325,87.224 ; 114.285,93.281 114.285,91.048 116.992,88.341 116.992,87.224 ; 115.265,107.606 115.785,107.086 115.785,104.381 115.785,100.164 115.722,100.101 ; 116.285,93.281 116.285,91.461 118.567,89.179 122.123,89.179 ; 116.285,102.51 116.285,104.381 ; 116.385,102.51 116.889,102.006 118.44,102.006 118.785,102.351 118.785,104.381 118.785,108.828 119.063,109.106 119.964,109.106 ; 117.043,107.606 117.285,107.364 117.285,104.381 ; 117.551,111.912 117.043,111.404 117.043,109.106 117.944,109.106 118.285,108.765 118.285,104.381 ; v1(119.837,96.037) 119.837,97.053 120.865,98.081 122.085,98.081 ; v1(120.23,107.34) 119.964,107.606 119.285,106.927 119.285,104.381 119.285,100.184 v1(119.202,100.101) ; 120.285,93.281 130.225,93.281 130.263,93.243 ; 121.869,107.606 121.869,105.816 v1(122.377,105.308) ; 121.869,109.106 123.901,109.106 124.79,109.995 124.79,112.039 v1(124.663,111.912) ; 122.085,95.081 131.962,95.081 133.68,96.799 133.68,106.959 131.337,109.302 129.038,109.302 127.838,108.102 ; 122.085,95.581 131.7,95.581 133.045,96.926 133.045,105.435 130.378,108.102 ; 122.085,96.081 131.438,96.081 132.41,97.053 132.41,103.744 130.592,105.562 130.378,105.562 ; 122.085,96.581 130.795,96.581 131.775,97.561 131.775,103.53 130.943,104.362 129.881,104.362 128.681,105.562 127.838,105.562 ; 122.085,97.081 125.072,97.081 126.06,98.069 126.06,99.974 126.568,100.482 127.838,100.482 ; 122.085,97.581 124.429,97.581 125.425,98.577 125.425,100.609 127.838,103.022 ; 122.085,98.581 123.651,98.581 v1(124.409,99.339) ; 122.085,99.581 119.849,99.581 119.329,100.101 v1(119.202,100.101) ; 122.085,102.081 124.738,102.081 126.182,103.525 126.182,119.278 125.547,119.913 123.52,119.913 ; 131.763,93.243 131.763,90.334 131.775,90.322 ; 74.422,99.924 v1(77.902,99.924) ; 115.722,100.101 v1(119.202,100.101)
  Top Layer w0.381: 59.207,53.645 59.207,51.003 59.868,50.343 ; 59.309,82.347 59.309,79.705 59.969,79.045 ; 59.995,38.151 58.471,38.151 58.166,38.456 58.166,42.559 59.473,43.866 60.63,43.866 ; 60.096,66.853 58.572,66.853 58.268,67.158 58.268,71.261 59.575,72.568 60.731,72.568 ; 69.012,50.368 69.037,50.394 69.037,53.645 ; 69.113,79.07 69.139,79.096 69.139,82.347 ; 70.079,30.263 73.508,30.263 ; 70.18,58.965 73.609,58.965 ; 74.854,50.368 74.854,53.111 75.387,53.645 ; 74.955,79.07 74.955,81.813 75.489,82.347 ; 81.636,39.298 82.343,39.298 85.166,36.474 85.166,35.255 ; 81.686,42.16 83.341,42.16 85.166,40.335 ; 81.737,68 82.445,68 85.268,65.176 85.268,63.957 ; 81.788,70.862 83.443,70.862 85.268,69.037 ; 95.593,67.081 95.593,59.575 96.85,58.318 v2(108.712,58.318) ; 97.829,63.322 97.829,61.556 98.4,60.985 102.108,60.985 104.623,63.5 110.868,63.5 112.852,61.515 ; 108.712,60.985 v2(108.712,58.318) ; 114.554,61.513 114.554,58.979 113.894,58.318 v2(108.712,58.318) ; 114.63,81.839 114.822,82.031 124.049,82.031 127.593,82.031 128.149,82.587 133.033,82.587 134.671,80.95 134.671,79.654 ; 119.697,61.515 120.895,62.713 126.289,62.713 126.39,62.713 128.702,60.401 129.637,60.401 ; 129.637,62.687 132.656,62.687 ; 134.341,68.123 135.674,66.789 135.674,62.687
  Top Layer w0.5: 74.6,119.736 74.6,118.339 75.362,117.577 78.283,117.577 80.188,115.672 80.188,114.656 ; 115.9,119.913 115.9,118.516 116.662,117.754 119.583,117.754 121.488,115.849 121.488,114.833
  Top Layer w0.508: 55.702,41.826 57.624,43.748 57.624,45.863 58.928,47.168 60.63,47.168 ; 55.804,70.528 57.725,72.45 57.725,74.565 59.03,75.87 60.731,75.87 ; 58.903,31.394 58.852,31.445 59.995,32.588 59.995,38.151 ; 59.004,60.096 58.953,60.147 60.096,61.29 60.096,66.853
  Top Layer w0.762: 55.702,39.326 55.508,39.326 53.645,37.463 53.645,29.058 54.132,28.57 82.672,28.57 84.48,30.378 81.546,33.313 79.527,33.313 ; 55.804,68.028 55.049,68.028 53.746,66.726 53.746,58.344 54.818,57.272 82.774,57.272 84.582,59.08 81.648,62.015 79.629,62.015 ; 59.995,41.453 61.951,41.453 62.332,41.834 v2(62.535,41.834) 62.535,41.529 62.916,41.148 62.916,38.393 ; 60.096,70.155 62.052,70.155 62.433,70.536 v2(62.636,70.536) 62.636,70.231 63.017,69.85 63.017,67.095 ; 129.849,79.731 132.211,77.368 134.671,77.368 140.411,77.368 142.697,75.082 142.697,74.6 142.697,72.06
  Top Layer w1.016: v2@114.63,79.426 116.625,77.431 124.049,77.431 ; 117.958,61.515 117.958,58.191 118.593,57.556 126.187,57.556 v2(126.314,57.683) ; 126.289,60.427 126.314,60.401 v2(126.314,57.683) ; 132.656,60.401 132.656,57.751 v2(132.588,57.683) ; 142.697,69.52 142.697,66.98 142.697,64.44 142.697,63.525 139.573,60.401 135.674,60.401 135.674,58.737 134.62,57.683 v2(132.588,57.683) ; v2(126.314,57.683) v2(132.588,57.683)
  Top Layer w1.524: 98.895,67.081 105.105,67.081 107.315,69.291 107.315,74.168 105.486,75.997 105.486,76.708 105.486,77.419 107.62,79.553 v2(114.63,79.553)
  Bottom Layer w0.3: 58.09,95.098 58.852,94.336 v1@62.357,94.336 ; 58.09,97.638 59.43,98.978 66.656,98.978 v1(67.615,98.019) ; 61.646,119.736 61.646,118.212 63.678,116.18 70.79,116.18 72.441,114.529 72.441,110.973 70.155,108.687 v1(70.155,106.02) ; 62.727,87.224 62.357,87.594 v1@62.357,94.336 ; 64.186,119.736 64.186,118.72 65.71,117.196 71.044,117.196 73.203,115.037 73.203,110.5 72.533,109.83 72.533,102.048 v1(72.441,101.956) ; 65.71,97.638 63.678,97.638 62.408,96.368 v1@62.408,94.488 ; 65.71,100.178 65.976,99.912 v1(72.683,99.912) v1@72.695,99.912 ; 66.726,120.56 66.726,119.736 67.453,119.736 ; 72.06,119.736 72.426,119.736 74.019,118.143 76.828,118.143 78.918,116.053 78.918,109.051 77.98,108.113 77.98,106.323 79.172,105.131 v1(81.077,105.131) 81.077,98.4 v1(78.537,95.86) ; v1(77.013,102.083) 78.283,102.083 79.299,101.067 79.299,99.035 78.664,98.4 v1(77.902,98.4) ; 77.14,99.924 v1(77.902,99.924) ; 79.553,114.021 80.188,114.656 ; 81.825,89.277 81.839,89.263 ; 81.839,85.585 84.125,85.585 85.534,85.585 86.425,86.476 v1(86.425,89.277) ; v1(82.601,107.163) 83.236,107.163 ; v1(83.109,99.162) 85.592,101.645 87.878,101.645 89.078,102.845 ; v1(83.363,111.735) 86.538,114.91 86.538,118.034 89.078,120.574 ; 99.39,95.275 100.152,94.513 v1@103.657,94.513 ; 99.39,97.815 100.73,99.155 107.956,99.155 v1(108.915,98.196) ; 102.946,119.913 102.946,118.389 104.978,116.357 112.09,116.357 113.741,114.706 113.741,111.15 111.455,108.864 v1(111.455,106.197) ; 104.028,87.401 103.657,87.772 v1@103.657,94.513 ; 105.486,119.913 105.486,118.897 107.01,117.373 112.344,117.373 114.503,115.214 114.503,110.677 113.833,110.007 113.833,102.225 v1(113.741,102.133) ; 107.01,97.815 104.978,97.815 103.708,96.545 v1@103.708,94.666 ; 107.01,100.355 107.276,100.089 v1(113.983,100.089) v1@113.995,100.089 ; 108.026,120.737 108.026,119.913 108.753,119.913 ; 113.36,119.913 113.726,119.913 115.319,118.32 118.128,118.32 120.218,116.23 120.218,109.228 119.28,108.29 119.28,106.5 120.472,105.308 v1(122.377,105.308) 122.377,98.577 v1(119.837,96.037) ; v1(118.313,102.26) 119.583,102.26 120.599,101.244 120.599,99.212 119.964,98.577 v1(119.202,98.577) ; 118.44,100.101 v1(119.202,100.101) ; 120.853,114.198 121.488,114.833 ; 123.125,89.454 123.139,89.44 ; 123.139,85.762 125.425,85.762 126.834,85.762 127.725,86.653 v1(127.725,89.454) ; v1(123.901,107.34) 124.536,107.34 ; v1(124.409,99.339) 126.892,101.822 129.178,101.822 130.378,103.022 ; v1(124.663,111.912) 127.838,115.087 127.838,118.212 130.378,120.752 ; v1@62.357,94.336 62.357,94.488 v1@62.408,94.488 ; v1@62.357,94.336 v1(62.408,94.336) ; v1(62.408,94.336) v1@62.408,94.488 ; v1(62.408,94.336) 62.56,94.488 v1@62.408,94.488 ; v1@103.657,94.513 103.657,94.666 v1@103.708,94.666 ; v1@103.657,94.513 v1(103.708,94.513) ; v1(103.708,94.513) v1@103.708,94.666 ; v1(103.708,94.513) 103.861,94.666 v1@103.708,94.666
  Bottom Layer w0.5: 57.582,113.005 57.582,121.133 58.025,121.576 65.71,121.576 66.726,120.56 ; 67.453,119.736 69.231,121.514 72.822,121.514 74.6,119.736 ; 74.727,114.656 74.727,94.197 81.839,87.085 81.839,89.263 ; 77.14,99.924 75.87,98.654 75.87,94.717 77.902,92.685 82.22,92.685 84.125,90.78 84.125,89.277 84.125,87.085 ; 79.553,114.021 79.553,107.786 v1(78.93,107.163) v1(82.601,107.163) ; 83.236,107.163 86.538,110.465 ; 98.882,113.182 98.882,121.31 99.325,121.753 107.01,121.753 108.026,120.737 ; 108.753,119.913 110.531,121.691 114.122,121.691 115.9,119.913 ; 116.027,114.833 116.027,94.374 123.139,87.262 123.139,89.44 ; 118.44,100.101 117.17,98.831 117.17,94.894 119.202,92.862 123.52,92.862 125.425,90.957 125.425,89.454 125.425,87.262 ; 120.853,114.198 120.853,107.963 v1(120.23,107.34) v1(123.901,107.34) ; 124.536,107.34 127.838,110.642
  Bottom Layer w0.508: 55.702,31.826 56.312,31.826 62.763,38.278 v2(69.647,38.278) ; 55.804,46.126 66.751,46.126 v2(70.79,42.088) ; 55.804,48.666 66.751,48.666 v2(73.457,41.961) ; 55.804,60.528 56.413,60.528 62.865,66.98 v2(69.748,66.98) ; 55.815,34.214 55.702,34.326 54.595,34.326 53.95,33.68 53.95,29.489 54.305,29.134 64.567,29.134 v2(66.853,31.42) ; 55.905,74.828 66.853,74.828 v2(70.891,70.79) ; 55.905,77.368 66.853,77.368 v2(73.558,70.663) ; 55.916,62.916 55.804,63.028 54.697,63.028 54.051,62.382 54.051,58.191 54.407,57.836 64.668,57.836 v2(66.954,60.122) ; v2(74.6,39.929) 79.248,44.577 86.665,44.577 ; v2(74.701,68.631) 79.35,73.279 86.766,73.279
  Bottom Layer w1.016: 55.702,39.326 60.027,39.326 v2(62.535,41.834) ; 55.804,68.028 60.129,68.028 v2(62.636,70.536) ; v2(126.314,57.683) 126.314,66.827 v2(126.34,66.853)
  other v2: 72.822,37.719 72.923,66.421

## Polygon pours and split planes (outlines as drawn)
GND on Top Layer "Top Layer-No Net" (solid, remove dead copper, shelved, pour order 16): 96.012,52.578 139.192,52.578 141.732,50.038 141.732,30.988 139.192,28.448 96.012,28.448 93.472,30.988 93.472,50.038 96.012,52.578
GND on Top Layer "Top Layer-No Net" (solid, remove dead copper, shelved, pour order 17): 88.138,54.61 88.138,27.178 145.542,27.178 145.542,54.61
GND on Top Layer "Top Layer-No Net" (solid, remove dead copper, pour order 30): 145.542,55.626 89.408,55.626 89.408,27.178 145.542,27.178
no net on Top Layer "Keep-Out Layer-No Net" (solid, pour order 25): 52.857,84.633 88.925,84.633 88.925,56.236 88.748,56.058 52.857,56.058
no net on Top Layer "Keep-Out Layer-No Net" (solid, pour order 26): 52.756,55.931 88.824,55.931 88.824,27.534 88.646,27.356 52.756,27.356
no net on Top Layer "Top Layer-No Net" (solid, remove dead copper, pour order 29): 145.288,84.353 89.154,84.353 89.154,55.905 145.288,55.905
no net on Top Layer "Keep-Out Layer-No Net" (solid, remove dead copper, pour order 20): 52.578,122.098 52.578,84.76 93.447,84.76 93.523,84.684 93.523,121.895
no net on Top Layer "Keep-Out Layer-No Net" (solid, remove dead copper, pour order 18): 93.878,122.276 93.878,84.938 134.747,84.938 134.823,84.861 134.823,122.072
no net on Bottom Layer "Keep-Out Layer-No Net" (solid, pour order 23): 52.857,84.658 88.9,84.658 88.925,84.633 88.849,84.557 88.849,56.058 52.984,56.058
no net on Bottom Layer "Keep-Out Layer-No Net" (solid, pour order 24): 52.756,55.956 88.798,55.956 88.824,55.931 88.748,55.855 88.748,27.356 52.883,27.356
GND on Bottom Layer "Top Layer-No Net" (solid, remove dead copper, pour order 28): 89.408,55.626 145.542,55.626 145.542,27.178 89.408,27.178
no net on Bottom Layer "Top Layer-No Net" (solid, remove dead copper, pour order 27): 89.154,84.353 145.288,84.353 145.288,55.905 89.154,55.905
no net on Bottom Layer "Keep-Out Layer-No Net" (solid, remove dead copper, pour order 22): 93.523,121.895 93.523,84.684 52.654,84.684 52.654,122.199 52.578,122.276
no net on Bottom Layer "Keep-Out Layer-No Net" (solid, remove dead copper, pour order 21): 134.823,122.072 134.823,84.861 93.955,84.861 93.955,122.377 93.878,122.453
GND on Bottom Layer "Top Layer-No Net" (solid, remove dead copper, shelved, pour order 19): 88.138,54.61 88.138,27.178 145.542,27.178 145.542,54.61

## Keep-outs
Keep-Out Layer:
  lines w0.254: 52.756,55.931 88.824,55.931 88.824,27.534 88.824,27.432 88.748,27.356 52.756,27.356 52.756,55.956 ; 52.857,84.633 88.925,84.633 88.925,56.236 88.925,56.134 88.849,56.058 52.857,56.058 52.857,84.658 ; 56.312,84.684 52.654,84.684 52.578,84.76 52.578,122.276 56.312,122.276 ; 97.612,84.861 93.955,84.861 93.878,84.938 93.878,122.453 97.612,122.453 ; 132.74,84.938 132.791,84.887 ; 89.154,55.905 89.154,82.067 89.154,83.261 89.154,84.353 90.399,84.353 145.288,84.353 145.288,83.337 145.288,55.905 89.154,55.905 ; 89.408,27.178 145.542,27.178 145.542,54.61 145.542,55.626 90.653,55.626 89.408,55.626 89.408,54.534 89.408,53.34 89.408,27.178
  lines w0.3: 56.312,84.684 93.523,84.684 93.523,121.895 93.142,122.276 56.312,122.276 ; 97.612,84.861 134.823,84.861 134.823,122.072 134.442,122.453 97.612,122.453

## Other copper
Top Layer:
  text "98.493 (mm)" at 44.408,66.095 h1.52 r89.88
  text "104.245 (mm)" at 95.804,21.137 h1.52 r359.54

## Text inside footprints (layer, text, board x,y; h text height)
C6_2: Top Overlay "+" at 77.546,53.924 h2.03
C6_4: Top Overlay "+" at 77.648,82.626 h2.03
MRF24J40MB: Top Overlay "2" at 88.57,112.878 h1.27 r270; Top Overlay "1" at 86.03,112.878 h1.27 r270; Top Overlay "1" at 86.03,95.606 h1.27 r270; Top Overlay "1" at 86.03,94.59 h1.27 r270; Top Overlay "12" at 88.57,95.606 h1.27 r270
MRF24J40MB_1: Top Overlay "2" at 129.87,113.055 h1.27 r270; Top Overlay "1" at 127.33,113.055 h1.27 r270; Top Overlay "1" at 127.33,95.783 h1.27 r270; Top Overlay "1" at 127.33,94.767 h1.27 r270; Top Overlay "12" at 129.87,95.783 h1.27 r270
U1: Top Overlay "*" at 65.069,44.564 h0.79; Mechanical 1 "*" at 65.069,44.564 h0.79
U1_1: Top Overlay "*" at 65.171,73.266 h0.79; Mechanical 1 "*" at 65.171,73.266 h0.79